# Altium PCB 通信工程(专升本)2101-210806300163-李烨攀-单片机控制流水灯电路.PcbDoc
Units mil, origin at the board's own origin, x right, y up, seen from the top; angles counter-clockwise.
Board outline 4500 x 3000 mil, 2 copper layers (Top Layer, Bottom Layer); 21 components, 24 nets, 95 pads, 0 vias.
Unrouted connection lines stored in the file: 1.
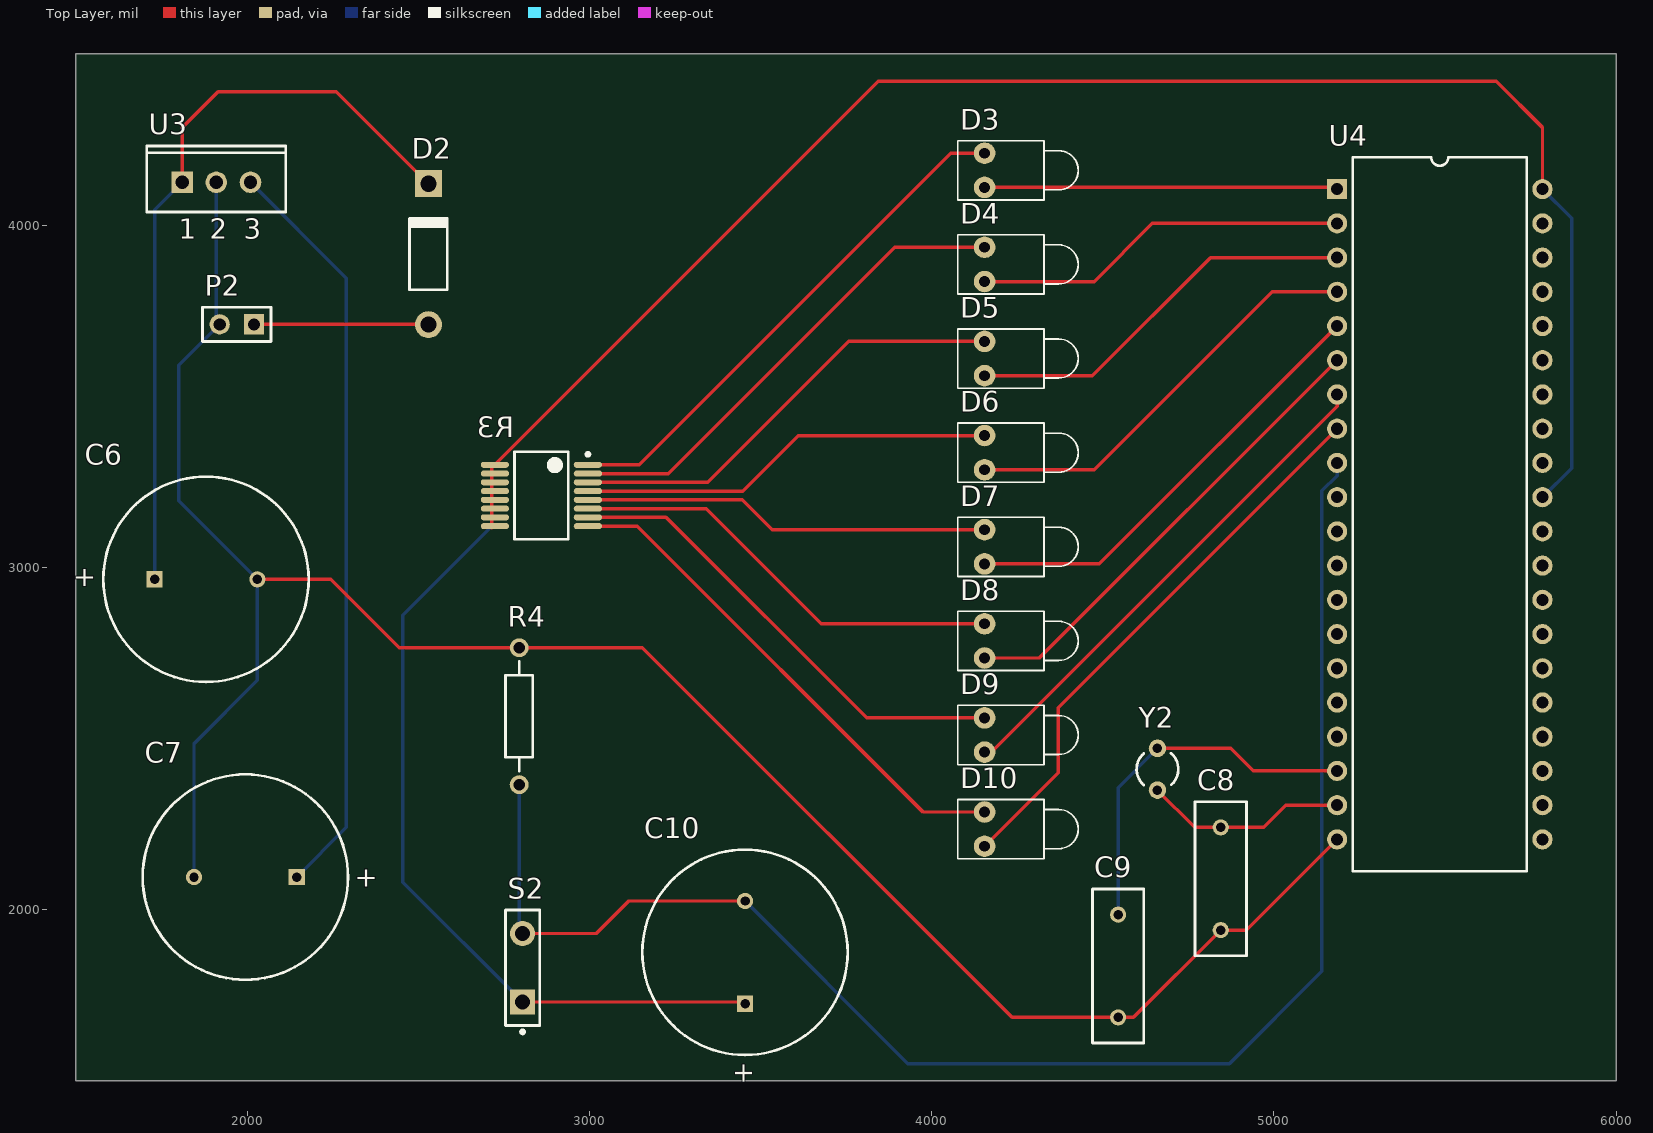
[diagram p0: Top Layer view]
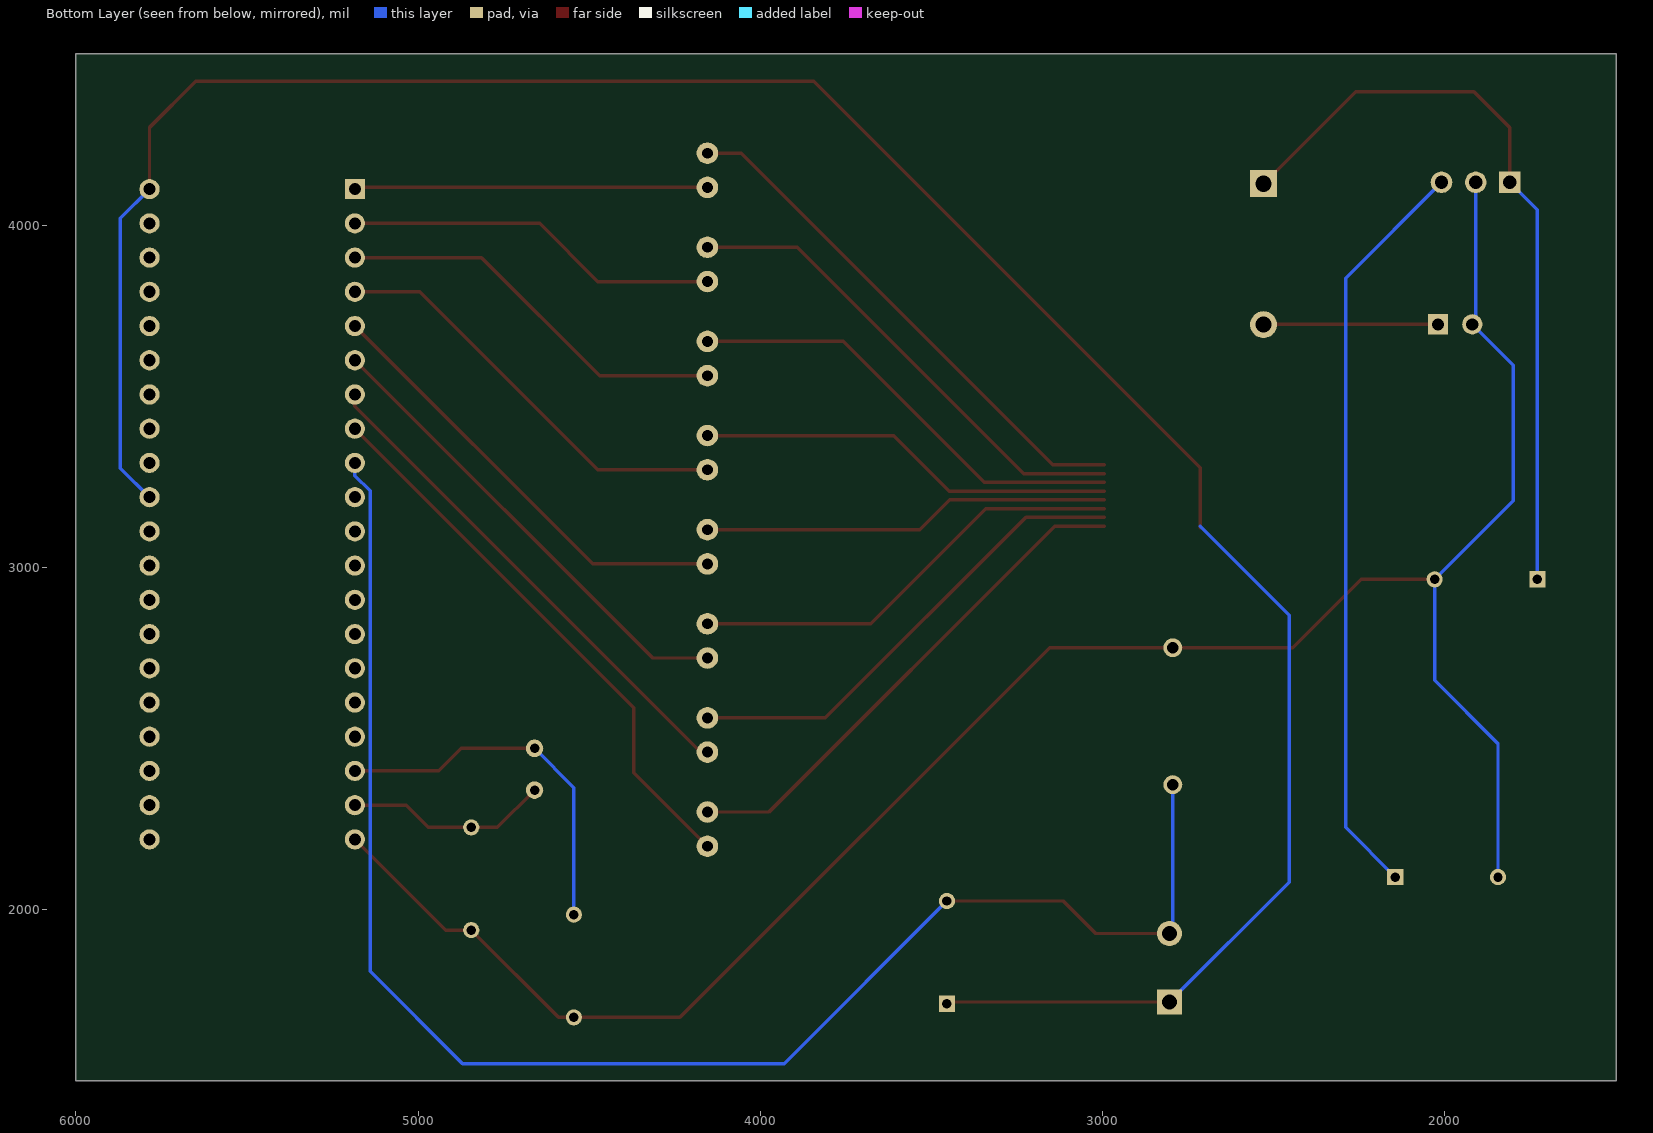
[diagram p1: Bottom Layer view, seen from below]

## Layer stack, top to bottom
Top Solder: solder mask 0.4, Solder Resist, Dk 3.5
Top Layer: signal copper 1.4
Dielectric 1: dielectric 12.6, FR-4, Dk 4.8
Bottom Layer: signal copper 1.4
Bottom Solder: solder mask 0.4, Solder Resist, Dk 3.5

## Board outline
1500,1500 1500,4500 6000,4500 6000,1500

## Design rules (kind name [scope] priority, off if disabled: settings)
Clearance [All] p1: gap=10
PolygonConnect [All] p1: connectstyle=Relief reliefconductorwidth=10 reliefentries=4 polygonreliefangle="90 Angle" airgapwidth=10
RoutingVias [All] p1: holewidth=28 width=50 viastyle="Through Hole" minholewidth=28 minwidth=50 maxholewidth=28 maxwidth=50
SolderMaskExpansion [All] p1: expansion=4
Width [All] p1: maxlimit=10 minlimit=10 preferedwidth=10
30 further rules are at their usual default settings.

## Classes and differential pairs
component class 通信工程(专升本)2101-210806300163-李烨攀-单片机控制流水灯电路: C7 C8 C9 C10 D2 D3 D4 D5 D6 D8 D9 D10 P2 R3 R4 S2 U3 U4 Y2

## Components (designator, comment, footprint, x,y, rotation, side; value= is the part's Value field where it differs from the comment)
C6 "Cap Pol1" RB7.6-15 1880,2965 r180 top
C7 "Cap Pol1" RB7.6-15 1995,2095 r0 top
C8 "Cap" RAD-0.3 4845,2090 r90 top
C9 "Cap" RAD-0.3 4545,1835 r90 top
C10 "Cap Pol1" RB7.6-15 3455,1875 r270 top
D2 "1N4001" DO-41 2530,3915 r90 top
D3 "LED1" LED-1 4155,4160 r0 top
D4 "LED1" LED-1 4155,3885 r0 top
D5 "LED1" LED-1 4155,3610 r0 top
D6 "LED1" LED-1 4155,3335 r0 top
D7 "LED1" LED-1 4155,3060 r0 top
D8 "LED1" LED-1 4155,2785 r0 top
D9 "LED1" LED-1 4155,2510 r0 top
D10 "LED1" LED-1 4155,2235 r0 top
P2 "Header 2" HDR1X2 2020,3710 r180 top
R3 "Res Pack4" SSOP16_N 2860,3210 r180 top
R4 "Res2" AXIAL-0.4 2795,2565 r270 top
S2 "SW-PB" SPST-2 2805,1830 r90 top
U3 "MC7805ACT" 221A-04 1910,4125 r0 top
U4 "P89C52X2BN" SOT129-1 5485,3155 r270 top
Y2 "XTAL" R38 4660,2410 r180 top

## Footprints (in the part's own frame and the unit in brackets; to place one, negate y for a bottom-side part, rotate by r counter-clockwise, add the part's x,y. Pads: shape width x height; smd on the part's side, far side on the other; paste and mask are expansions set on the pad)
221A-04 [mm] "TO, Thru-Hole, Vertical, Heatsink Mounted; 3 In-Line Leads; Pitch 2.54 mm"
  rect 1.6x1.6 hole 1: 1(-2.54,0)
  round 1.6 hole 1: 2(0,0) 3(2.54,0)
  silkscreen extent -5.15,-2.2 5.15,2.7
AXIAL-0.4 [mm] "Axial Device, Thru-Hole; 2 Leads; 0.4 in Pin Spacing"
  round 1.4 hole 0.85: 1(-5.08,0) 2(5.08,0)
  silkscreen extent -4.06,-1.02 4.06,1.02
DO-41 [mm] "Diode, Axial; Body 5.2 x 2.7 mm (LxDia. max), Lead Dia. 0.86 mm (max)"
  round 2 hole 1.2: 1(-5.23,0)
  rect 2x2 hole 1.2: 2(5.23,0)
  silkscreen extent -2.65,-1.4 2.75,1.4
HDR1X2 [mm] "Connector; Header; 2 Position"
  rect 1.5x1.5 hole 0.9: 1(0,0)
  round 1.5 hole 0.9: 2(2.54,0)
  silkscreen extent -1.27,-1.27 3.81,1.27
LED-1 [mm] "LED; 2 Leads"
  round 1.6 hole 0.8: 1(0,1.27) 2(0,-1.27)
  silkscreen extent -2,-2.2 6.95,2.2
R38 [mm] "Crystal, Thru-Hole; 2 Leads; Body 3.1 x 8.2 mm (Dia.xH)"
  round 1.3 hole 0.7: 1(0,1.55) 2(0,-1.55)
  silkscreen extent -1.55,-1.19 1.55,1.17
RAD-0.3 [mm] "Radial Cap, Thru-Hole; 2 Leads; 0.3 in Pin Spacing"
  round 1.2 hole 0.7: 1(-3.81,0) 2(3.81,0)
  silkscreen extent -5.71,-1.91 5.71,1.91
RB7.6-15 [mm] "Polarized Capacitor (Radial); 2 Leads"
  rect 1.2x1.2 hole 0.7: 1(3.81,0)
  round 1.2 hole 0.7: 2(-3.81,0)
  silkscreen extent -7.62,-7.62 7.62,7.62
SOT129-1 [mm] "DIP, Plastic; 40 Leads; Row Spacing 15.24 mm; Pitch 2.54 mm"
  rect 1.5x1.5 hole 0.9: 1(-24.13,-7.62)
  round 1.5 hole 0.9: 2(-21.59,-7.62) 3(-19.05,-7.62) 4(-16.51,-7.62) 5(-13.97,-7.62) 6(-11.43,-7.62) 7(-8.89,-7.62) 8(-6.35,-7.62) 9(-3.81,-7.62) 10(-1.27,-7.62) 11(1.27,-7.62) 12(3.81,-7.62) 13(6.35,-7.62) 14(8.89,-7.62) 15(11.43,-7.62) 16(13.97,-7.62) 17(16.51,-7.62) 18(19.05,-7.62) 19(21.59,-7.62) 20(24.13,-7.62) 21(24.13,7.62) 22(21.59,7.62) 23(19.05,7.62) 24(16.51,7.62) 25(13.97,7.62) 26(11.43,7.62) 27(8.89,7.62) 28(6.35,7.62) 29(3.81,7.62) 30(1.27,7.62) 31(-1.27,7.62) 32(-3.81,7.62) 33(-6.35,7.62) 34(-8.89,7.62) 35(-11.43,7.62) 36(-13.97,7.62) 37(-16.51,7.62) 38(-19.05,7.62) 39(-21.59,7.62) 40(-24.13,7.62)
  silkscreen extent -26.5,-6.45 26.5,6.45
SPST-2 [mm] "Switch; 2 Leads"
  rect 1.85x1.85 hole 1.1: 1(-2.54,0)
  round 1.85 hole 1.1: 2(2.54,0)
  silkscreen extent -4.89,-1.27 4.28,1.27
SSOP16_N [mm] "SOP, 16-Leads, Body 6.2x5.3mm, Pitch 0.65mm, IPC Medium Density"
  oval 2.1x0.45 smd: 1(-3.45,-2.275) 2(-3.45,-1.625) 3(-3.45,-0.975) 4(-3.45,-0.325) 5(-3.45,0.325) 6(-3.45,0.975) 7(-3.45,1.625) 8(-3.45,2.275) 9(3.45,2.275) 10(3.45,1.625) 11(3.45,0.975) 12(3.45,0.325) 13(3.45,-0.325) 14(3.45,-0.975) 15(3.45,-1.625) 16(3.45,-2.275)
  silkscreen extent -3.57,-3.25 2,3.25, body extent -2.7,-3.25 2.7,3.25, height 2

## Part data
C6 C7 C10: "Polarized Capacitor (Radial)"
C8 C9: "Capacitor"
D2: "1.0 Ampere General Purpose Rectifier"
D3 D4 D5 D6 D7 D8 D9 D10: "Typical RED GaAs LED"
P2: "Header, 2-Pin"
R3: "Isolated Resistor Network"
R4: "Resistor"
S2: "Switch"
U3: "3-Terminal Positive Fixed Voltage Regulator"
U4: "80C51 8-Bit Flash Microcontroller Family, 8 kB Flash"
Y2: "Crystal Oscillator"

## Nets (pads, with @x,y where several pads share a name; then routed paths per layer and width w, separated by ;. In a path a pad name is that pad's centre, name@x,y a point inside that pad or via, vN(x,y) a via of type N, cw(c..) or ccw(c..) an arc to the next point about the centre after c; other vN are vias at no path point)
GND: C6.2 C7.2 C8.1 C9.1 P2.2 R4.1 U3.2 U4.20 | length 6156.3
  Top Layer w10: C6.2 2245,2965 2445,2765 R4.1 3155,2765 4235,1685 C9.1 4590,1685 C8.1 4920,1940 U4.20
  Bottom Layer w10: C7.2 1845,2485 2030,2670 C6.2 1800,3195 1800,3590 P2.2 1910,3720 U3.2
NetC6_1: C6.1 D2.2 U3.1 | length 2228.1
  Top Layer w10: U3.1 1810,4285 1915,4390 2260.91,4390 D2.2
  Bottom Layer w10: C6.1 1730,4045 U3.1
NetC7_1: C7.1 U3.3 | length 2206
  Bottom Layer w10: U3.3 2290,3845 2290,2240 C7.1
NetC8_2: C8.2 U4.19 Y2.1 | length 597.1
  Top Layer w10: Y2.1 4768.98,2240 C8.2 4970,2240 5035,2305 U4.19
NetC9_2: C9.2 U4.18 Y2.2 | length 1086
  Top Layer w10: Y2.2 4873.98,2471.02 4940,2405 U4.18
  Bottom Layer w10: C9.2 4545,2356.02 Y2.2
NetC10_2: C10.2 R4.2 S2.2 U4.9 | length 4626
  Top Layer w10: S2.2 3020,1930 3115,2025 C10.2
  Bottom Layer w10: R4.2 2795,1940 S2.2 ; C10.2 3930,1550 4870.47,1550 5140.47,1820 5140.47,3223.44 5185,3267.97 U4.9
NetD2_1: D2.1 P2.1 | length 510.4
  Top Layer w10: P2.1 2529.09,3710 D2.1
NetD3_1: D3.1 R3.1 | length 1536.3
  Top Layer w10: R3.1 3145.43,3299.57 4055.87,4210 D3.1
NetD4_1: D4.1 R3.2 | length 1433
  Top Layer w10: R3.2 3231.02,3273.98 3892.05,3935 D4.1
NetD5_1: D5.1 R3.3 | length 1329.7
  Top Layer w10: R3.3 3346.61,3248.39 3758.23,3660 D5.1
NetD6_1: D6.1 R3.4 | length 1226.4
  Top Layer w10: R3.4 3447.8,3222.8 3610,3385 D6.1
NetD7_1: D7.1 R3.5 | length 1195.3
  Top Layer w10: R3.5 3447.2,3197.2 3534.41,3110 D7.1
NetD8_1: D8.1 R3.6 | length 1298.6
  Top Layer w10: R3.6 3341.61,3171.61 3678.23,2835 D8.1
NetD9_1: D9.1 R3.7 | length 1401.9
  Top Layer w10: R3.7 3223.98,3146.02 3810,2560 D9.1
NetD10_1: D10.1 R3.8 | length 1505.2
  Top Layer w10: R3.8 3139.57,3120.43 3975,2285 D10.1
P10: D3.2 U4.1 | length 1032.1
  Top Layer w10: D3.2 5180,4110 U4.1
P11: D4.2 U4.2 | length 1100.4
  Top Layer w10: D4.2 4475,3835 4645,4005 U4.2
P12: D5.2 U4.3 | length 1172.9
  Top Layer w10: D5.2 4470,3560 4815,3905 U4.3
P13: D6.2 U4.4 | length 1245.4
  Top Layer w10: D6.2 4475,3285 4995,3805 U4.4
P14: D7.2 U4.5 | length 1322.9
  Top Layer w10: D7.2 4490,3010 U4.5 U4.5@5180,3705
P15: D8.2 U4.6 | length 1390.4
  Top Layer w10: D8.2 4315,2735 U4.6
P16: D9.2 U4.7 | length 1483.4
  Top Layer w10: D9.2 4175,2460 5185,3470 U4.7
P17: D10.2 U4.8 | length 1646.6
  Top Layer w10: D10.2 4370,2400 4370,2590 U4.8
VCC: C10.1 R3.16 S2.1 U4.31 U4.40 | length 7214.4
  Top Layer w10: 2715,3115 2715,3290.39 R3.16 3844.61,4420 5650,4420 5785,4285 U4.40 ; S2.1 3450,1730 C10.1
  Bottom Layer w10: 2715,3120 2455,2860 2455,2080 S2.1 ; U4.31 5870,3290 5870,4020 U4.40
pads on no net: R3.9 R3.10 R3.11 R3.12 R3.13 R3.14 R3.15 U4.10 U4.11 U4.12 U4.13 U4.14 U4.15 U4.16 U4.17 U4.21 U4.22 U4.23 U4.24 U4.25 U4.26 U4.27 U4.28 U4.29 U4.30 U4.32 U4.33 U4.34 U4.35 U4.36 U4.37 U4.38 U4.39

## Text inside footprints (layer, text, board x,y; h text height)
C6: Top Overlay "+" at 1559.85,2994.01 h59.06 r180
C7: Top Overlay "+" at 2315.15,2065.99 h59.06
C10: Top Overlay "+" at 3425.99,1554.85 h59.06 r270
U3: Top Overlay "3" at 1990.32,3960.63 h59.06; Top Overlay "2" at 1890.32,3960.63 h59.06; Top Overlay "1" at 1800.16,3960.63 h59.06